# EAGLE board BRX_pan (EAGLE 6.2), part 1 of 2
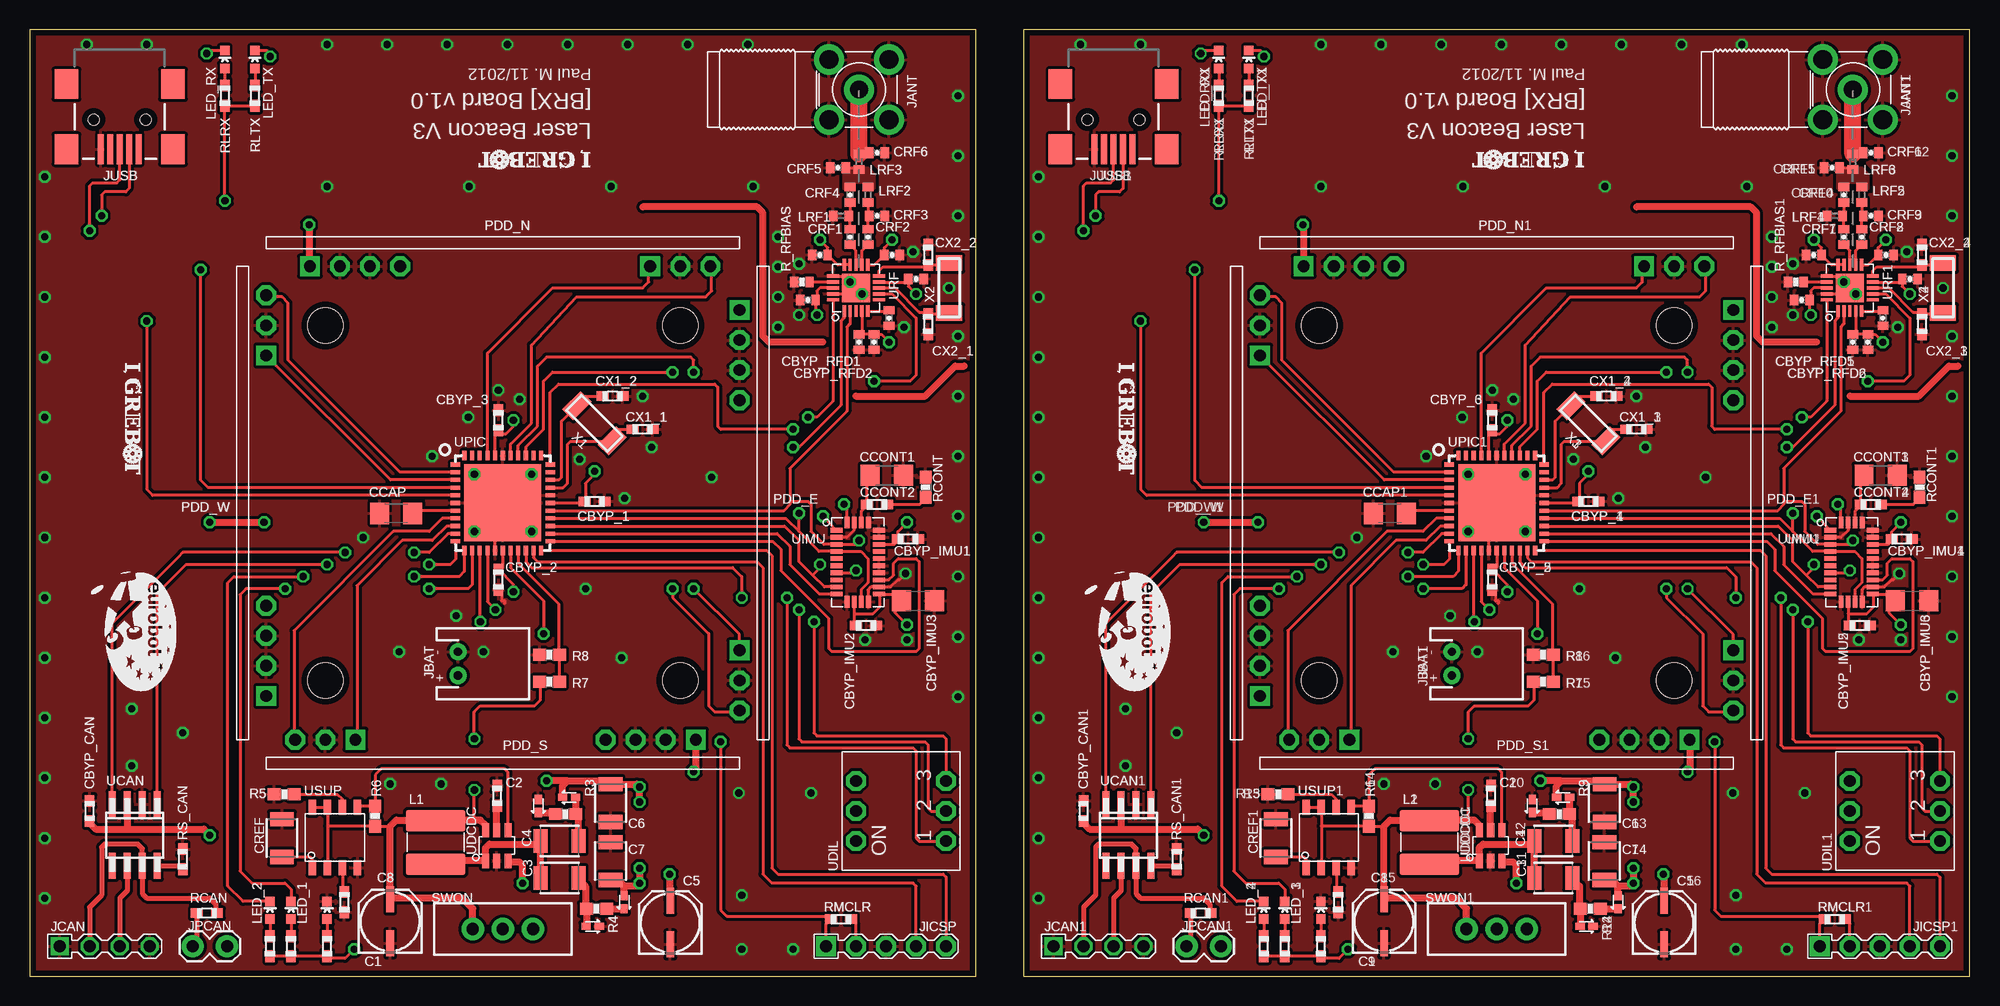
[diagram p0: board, top side]
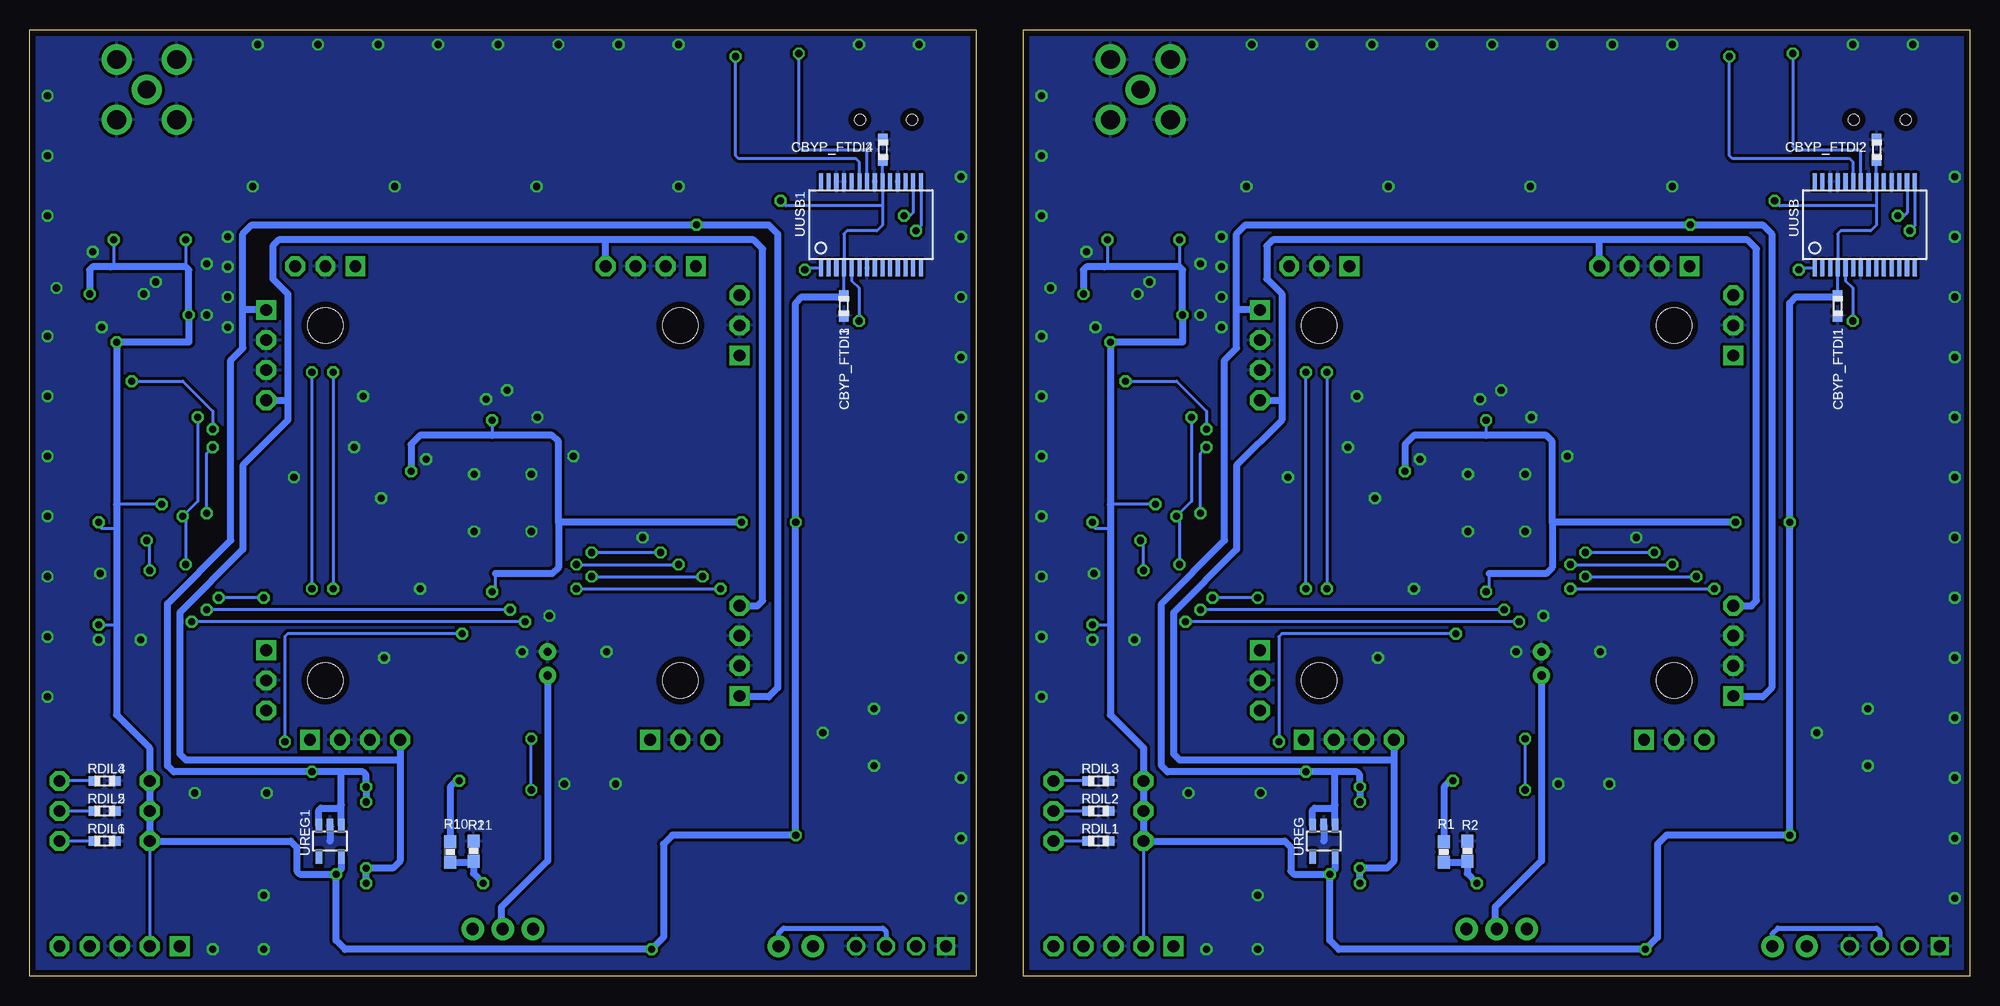
[diagram p1: board, bottom side, seen from below]

Size 164 x 80 mm. Coordinates in mm from the lower left corner, seen from the top.
Outline: 0,0 80,0 80,80 0,80 0,0
Outline: 84,0 164,0 164,80 84,80 84,0
Copper layers (1*16): Top 0.035mm / dielectric 1.5mm / Bottom 0.035mm
Design rules: minimum track width 10mil, minimum drill 0.6mm, track to track 6mil, track to pad 6mil, pad to pad 6mil, via to via 6mil, smd to smd 6mil, copper to edge 20mil, drill to drill 8mil, minimum pad ring 10mil, minimum via ring 8mil, stop-mask expansion 4mil, vias tented up to drill 0mil, thermal gap 10mil
Holes 3 mm at 25,55 55,55 55,25 25,25 109,55 139,55 139,25 109,25

## Footprints (pad centres in the part's own frame; a part is rotated, then mirrored left to right if it is on the bottom)
PANASONIC_C = smd 2.2 x 0.65: + 1.9,-0.2; - -1.8,-0.2
R0603 = smd 1 x 0.8: 1 -0.85,0; 2 0.85,0
1210 = smd 1.2 x 2: 1 -1.6,0; 2 1.6,0
1206 = smd 1.6 x 1.8: 1 -1.4,0; 2 1.4,0
0402-CAP = smd 0.7 x 0.9: 1 -0.65,0; 2 0.65,0
SOD-523 = smd 0.8 x 0.6: A -0.55,0; C 0.55,0
SMA-PCB-ANGLE = drill 1.5 pad 2.54: A 0,0 | drill 1.6 pad 2.54: B1 -2.54,2.54; B2 2.54,2.54; B3 2.54,-2.54; B4 -2.54,-2.54
JST-2-PTH = drill 0.7 pad 1.448: 1 -1,0; 2 1,0
CON4-2.54 = drill 1 square: 1 -3.81,0 | drill 1 octagon: 2 -1.27,0; 3 1.27,0; 4 3.81,0
CON5-2.54 = drill 1 pad 1.676 square: 1 -5.08,0 | drill 1 pad 1.676 octagon: 2 -2.54,0; 3 0,0; 4 2.54,0; 5 5.08,0
1X02_LOCK = drill 1.016 pad 1.88: 1 -0.178,0; 2 2.718,0
USB-MINIB = smd 2.5 x 0.5: D+ 2.5,0; D- 2.5,0.8; GND 2.5,-1.6; ID 2.5,-0.8; VBUS 2.5,1.6 | smd 2.5 x 2: MTN1 -3,4.5; MTN2 2.5,4.5; MTN3 -3,-4.5; MTN4 2.5,-4.5 | hole 0.9: 0,2.2; 0,-2.2
L-5X5 = smd 1.8 x 5: 1 -1.85,0; 2 1.85,0
LED-0603 = smd 0.8 x 0.8: A 0,-0.75; C 0,0.75
C0402 = smd 0.7 x 0.9: 1 -0.65,0; 2 0.65,0
PDD_SOCKET = drill 1 pad 1.676 square: 1 -16.31,0; 5 12.46,0 | drill 1 pad 1.676 octagon: 2 -13.77,0; 3 -11.23,0; 4 -8.69,0; 6 15,0; 7 17.54,0
0603-RES = smd 1.1 x 1: 1 -0.85,0; 2 0.85,0
0402-RES = smd 0.7 x 0.9: 1 -0.65,0; 2 0.65,0
SWITCH-SPDT = drill 1.016 pad 1.88: 1 0,2.54; 2 0,0; 3 0,-2.54
SO-08 = smd 0.6 x 2.2: 1 -1.905,-2.6; 2 -0.635,-2.6; 3 0.635,-2.6; 4 1.905,-2.6; 5 1.905,2.6; 6 0.635,2.6; 7 -0.635,2.6; 8 -1.905,2.6
TSOT-23 = smd 0.6 x 1.2: 1 -0.95,-1.3; 2 0,-1.3; 3 0.95,-1.3; 4 0.95,1.3; 5 0,1.3; 6 -0.95,1.3
SW_DIP-3 = drill 1 pad 1.676 octagon: 1A -2.54,3.81; 1B -2.54,-3.81; 2A 0,3.81; 2B 0,-3.81; 3A 2.54,3.81; 3B 2.54,-3.81
LLGA-28 = smd 0.4 x 1: 1 2.7,1.8; 2 2.1,1.8; 3 1.5,1.8; 4 0.9,1.8; 5 0.3,1.8; 6 -0.3,1.8; 7 -0.9,1.8; 8 -1.5,1.8; 9 -2.1,1.8; 10 -2.7,1.8; 15 -2.7,-1.8; 16 -2.1,-1.8; 17 -1.5,-1.8; 18 -0.9,-1.8; 19 -0.3,-1.8; 20 0.3,-1.8; 21 0.9,-1.8; 22 1.5,-1.8; 23 2.1,-1.8; 24 2.7,-1.8 | smd 1 x 0.4: 11 -3.35,0.9; 12 -3.35,0.3; 13 -3.35,-0.3; 14 -3.35,-0.9; 25 3.35,-0.9; 26 3.35,-0.3; 27 3.35,0.3; 28 3.35,0.9
QFN44-8X8 = smd 0.8 x 0.35: P$1 -4,3.25; P$2 -4,2.6; P$3 -4,1.95; P$4 -4,1.3; P$5 -4,0.65; P$6 -4,0; P$7 -4,-0.65; P$8 -4,-1.3; P$9 -4,-1.95; P$10 -4,-2.6; P$11 -4,-3.25; P$23 4,-3.25; P$24 4,-2.6; P$25 4,-1.95; P$26 4,-1.3; P$27 4,-0.65; P$28 4,0; P$29 4,0.65; P$30 4,1.3; P$31 4,1.95; P$32 4,2.6; P$33 4,3.25 | smd 0.35 x 0.8: P$12 -3.25,-4; P$13 -2.6,-4; P$14 -1.95,-4; P$15 -1.3,-4; P$16 -0.65,-4; P$17 0,-4; P$18 0.65,-4; P$19 1.3,-4; P$20 1.95,-4; P$21 2.6,-4; P$22 3.25,-4; P$34 3.25,4; P$35 2.6,4; P$36 1.95,4; P$37 1.3,4; P$38 0.65,4; P$39 0,4; P$40 -0.65,4; P$41 -1.3,4; P$42 -1.95,4; P$43 -2.6,4; P$44 -3.25,4 | smd 6.5 x 6.5: PAD 0,0
SOT23-5L = smd 0.55 x 1.2: 1 -0.95,-1.3; 2 0,-1.3; 3 0.95,-1.3; 4 0.95,1.3; 5 -0.95,1.3
QFN20-0.5 = smd 0.28 x 1: 1 -1,-1.95; 2 -0.5,-1.95; 3 0,-1.95; 4 0.5,-1.95; 5 1,-1.95; 11 1,1.95; 12 0.5,1.95; 13 0,1.95; 14 -0.5,1.95; 15 -1,1.95 | smd 1 x 0.28: 6 1.95,-1; 7 1.95,-0.5; 8 1.95,0; 9 1.95,0.5; 10 1.95,1; 16 -1.95,1; 17 -1.95,0.5; 18 -1.95,0; 19 -1.95,-0.5; 20 -1.95,-1 | smd 2.4 x 2.4: PAD 0,0
SOIC8 = smd 0.635 x 1.27: 1 -1.905,-2.54; 2 -0.635,-2.54; 3 0.635,-2.54; 4 1.905,-2.54; 5 1.905,2.54; 6 0.635,2.54; 7 -0.635,2.54; 8 -1.905,2.54
SSOP28DB = smd 0.348 x 1.397: 1 -4.225,-3.656; 2 -3.575,-3.656; 3 -2.925,-3.656; 4 -2.275,-3.656; 5 -1.625,-3.656; 6 -0.975,-3.656; 7 -0.325,-3.656; 8 0.325,-3.656; 9 0.975,-3.656; 10 1.625,-3.656; 11 2.275,-3.656; 12 2.925,-3.656; 13 3.575,-3.656; 14 4.225,-3.656; 15 4.225,3.656; 16 3.575,3.656; 17 2.925,3.656; 18 2.275,3.656; 19 1.625,3.656; 20 0.975,3.656; 21 0.325,3.656; 22 -0.325,3.656; 23 -0.975,3.656; 24 -1.625,3.656; 25 -2.275,3.656; 26 -2.925,3.656; 27 -3.575,3.656; 28 -4.225,3.656
XTAL_4.9-1.8 = smd 1.3 x 2.2: P$1 -2.1,0; P$2 2.1,0

## Placement (x,y rotation side)
C1  4.7uF  [PANASONIC_C]  30.28,4.6 90 top
C2  47nF_16V  [R0603]  39.52,15.26 90 top
C3  1uF_16V  [1210]  44.79,8.31 0 top
C4  1uF_16V  [1210]  44.79,11.44 0 top
C5  10uF  [PANASONIC_C]  53.95,4.49 90 top
C6  2.2uF_16V  [1210]  49.11,14.64 270 top
C7  2.2uF_16V  [1210]  49.11,9.74 90 top
C8  470nF  [R0603]  26.61,6.27 270 top
C9  4.7uF  [PANASONIC_C]  114.28,4.6 90 top
C10  47nF_16V  [R0603]  123.52,15.26 90 top
C11  1uF_16V  [1210]  128.79,8.31 0 top
C12  1uF_16V  [1210]  128.79,11.44 0 top
C13  2.2uF_16V  [1210]  133.11,14.64 270 top
C14  2.2uF_16V  [1210]  133.11,9.74 90 top
C15  470nF  [R0603]  110.61,6.27 270 top
C16  10uF  [PANASONIC_C]  137.95,4.49 90 top
CBYP_1  100nF_6.3V  [R0603]  47.75,40.13 0 top
CBYP_2  100nF_6.3V  [R0603]  39.62,33.53 270 top
CBYP_3  100nF_6.3V  [R0603]  39.62,46.99 90 top
CBYP_4  100nF_6.3V  [R0603]  131.75,40.13 0 top
CBYP_5  100nF_6.3V  [R0603]  123.62,33.53 270 top
CBYP_6  100nF_6.3V  [R0603]  123.62,46.99 90 top
CBYP_CAN  100nF_6.3V  [R0603]  5.08,13.97 90 top
CBYP_CAN1  100nF_6.3V  [R0603]  89.08,13.97 90 top
CBYP_FTDI1  100nF_6.3V  [R0603]  11.18,56.64 270 bottom
CBYP_FTDI2  100nF_6.3V  [R0603]  7.87,69.85 90 bottom
CBYP_FTDI3  100nF_6.3V  [R0603]  95.18,56.64 270 bottom
CBYP_FTDI4  100nF_6.3V  [R0603]  91.87,69.85 90 bottom
CBYP_IMU1  100nF_6.3V  [R0603]  74.25,36.95 0 top
CBYP_IMU2  100nF_6.3V  [R0603]  70.69,29.64 0 top
CBYP_IMU3  10uF_6.3V  [1206]  75.1,31.74 0 top
CBYP_IMU4  100nF_6.3V  [R0603]  158.25,36.95 0 top
CBYP_IMU5  100nF_6.3V  [R0603]  154.69,29.64 0 top
CBYP_IMU6  10uF_6.3V  [1206]  159.1,31.74 0 top
CBYP_RFA1  100nF_X5R  [0402-CAP]  72.9,60.96 180 top
CBYP_RFA2  100nF_X5R  [0402-CAP]  66.8,60.96 0 top
CBYP_RFA3  220pF_X7R  [0402-CAP]  65.79,57.15 0 top
CBYP_RFA4  220pF_X7R  [0402-CAP]  74.93,58.93 180 top
CBYP_RFA5  100nF_X5R  [0402-CAP]  156.9,60.96 180 top
CBYP_RFA6  100nF_X5R  [0402-CAP]  150.8,60.96 0 top
CBYP_RFA7  220pF_X7R  [0402-CAP]  149.79,57.15 0 top
CBYP_RFA8  220pF_X7R  [0402-CAP]  158.93,58.93 180 top
CBYP_RFD1  100nF_X5R  [0402-CAP]  70.1,53.59 90 top
CBYP_RFD2  220pF_X7R  [0402-CAP]  71.37,53.59 90 top
CBYP_RFD3  100nF_X5R  [0402-CAP]  72.64,55.63 90 top
CBYP_RFD4  100nF_X5R  [0402-CAP]  156.64,55.63 90 top
CBYP_RFD5  100nF_X5R  [0402-CAP]  154.1,53.59 90 top
CBYP_RFD6  220pF_X7R  [0402-CAP]  155.37,53.59 90 top
CCAP  10uF_6.3V  [1206]  30.99,39.12 180 top
CCAP1  10uF_6.3V  [1206]  114.99,39.12 180 top
CCONT1  10nF  [1206]  72.45,42.34 0 top
CCONT2  470nF  [R0603]  71.63,39.88 0 top
CCONT3  10nF  [1206]  156.45,42.34 0 top
CCONT4  470nF  [R0603]  155.63,39.88 0 top
CREF  1uF  [1210]  21.34,11.68 270 top
CREF1  1uF  [1210]  105.34,11.68 270 top
CRF1  100pF_NP0  [0402-CAP]  69.34,62.48 90 top
CRF2  100pF_NP0  [0402-CAP]  70.87,62.48 90 top
CRF3  1.0pF_NP0  [0402-CAP]  71.63,64.26 180 top
CRF4  1.0pF_NP0  [0402-CAP]  69.34,66.04 270 top
CRF5  1.8pF_NP0  [0402-CAP]  68.33,68.33 0 top
CRF6  1.5pF_NP0  [0402-CAP]  71.63,69.6 180 top
CRF7  100pF_NP0  [0402-CAP]  153.34,62.48 90 top
CRF8  100pF_NP0  [0402-CAP]  154.87,62.48 90 top
CRF9  1.0pF_NP0  [0402-CAP]  155.63,64.26 180 top
CRF10  1.0pF_NP0  [0402-CAP]  153.34,66.04 270 top
CRF11  1.8pF_NP0  [0402-CAP]  152.33,68.33 0 top
CRF12  1.5pF_NP0  [0402-CAP]  155.63,69.6 180 top
CX1_1  22pF_6.3V  [R0603]  51.82,46.23 0 top
CX1_2  22pF_6.3V  [R0603]  49.28,49.02 0 top
CX1_3  22pF_6.3V  [R0603]  135.82,46.23 0 top
CX1_4  22pF_6.3V  [R0603]  133.28,49.02 0 top
CX2_1  22pF_6.3V  [R0603]  75.95,55.12 270 top
CX2_2  22pF_6.3V  [R0603]  75.95,60.96 90 top
CX2_3  22pF_6.3V  [R0603]  159.95,55.12 270 top
CX2_4  22pF_6.3V  [R0603]  159.95,60.96 90 top
D1  PMEG2005  [SOD-523]  45.6,15.12 180 top
D2  PMEG2005  [SOD-523]  43,14.39 270 top
D3  PMEG2005  [SOD-523]  47.59,4.22 0 top
D4  PMEG2005  [SOD-523]  50.26,6.26 270 top
D5  PMEG2005  [SOD-523]  129.6,15.12 180 top
D6  PMEG2005  [SOD-523]  127,14.39 270 top
D7  PMEG2005  [SOD-523]  131.59,4.22 0 top
D8  PMEG2005  [SOD-523]  134.26,6.26 270 top
JANT  ENG_CD_1814400_C1  [SMA-PCB-ANGLE]  70.11,74.93 180 top
JANT1  ENG_CD_1814400_C1  [SMA-PCB-ANGLE]  154.11,74.93 180 top
JBAT  [JST-2-PTH]  36.21,26.42 270 top
JBAT1  [JST-2-PTH]  120.21,26.42 270 top
JCAN  SIL4  [CON4-2.54]  6.35,2.54 0 top
JCAN1  SIL4  [CON4-2.54]  90.35,2.54 0 top
JICSP  SIL5  [CON5-2.54]  72.39,2.54 0 top
JICSP1  SIL5  [CON5-2.54]  156.39,2.54 0 top
JPCAN  [1X02_LOCK]  13.97,2.54 0 top
JPCAN1  [1X02_LOCK]  97.97,2.54 0 top
JUSB  USBSMD  [USB-MINIB]  7.62,72.39 270 top
JUSB1  USBSMD  [USB-MINIB]  91.62,72.39 270 top
L1  10uH  [L-5X5]  34.31,11.31 270 top
L2  10uH  [L-5X5]  118.31,11.31 270 top
LED_1  [LED-0603]  22.1,5.59 0 top
LED_2  [LED-0603]  20.32,5.59 0 top
LED_3  [LED-0603]  106.1,5.59 0 top
LED_4  [LED-0603]  104.32,5.59 0 top
LED_POW  [LED-0603]  25.15,5.59 0 top
LED_POW1  [LED-0603]  109.15,5.59 0 top
LED_RX  [LED-0603]  16.51,77.47 0 top
LED_RX1  [LED-0603]  100.51,77.47 0 top
LED_TX  [LED-0603]  19.05,77.47 0 top
LED_TX1  [LED-0603]  103.05,77.47 0 top
LRF1  1.2nH  [C0402]  68.58,64.26 0 top
LRF2  1.2nH  [C0402]  70.87,66.04 90 top
LRF3  1.2nH  [C0402]  70.1,68.83 90 top
LRF4  1.2nH  [C0402]  152.58,64.26 0 top
LRF5  1.2nH  [C0402]  154.87,66.04 90 top
LRF6  1.2nH  [C0402]  154.1,68.83 90 top
PDD_E  PDD_BOARD  [PDD_SOCKET]  60,40 270 top
PDD_E1  PDD_BOARD  [PDD_SOCKET]  144,40 270 top
PDD_N  PDD_BOARD  [PDD_SOCKET]  40,60 0 top
PDD_N1  PDD_BOARD  [PDD_SOCKET]  124,60 0 top
PDD_S  PDD_BOARD  [PDD_SOCKET]  40,20 180 top
PDD_S1  PDD_BOARD  [PDD_SOCKET]  124,20 180 top
PDD_W  PDD_BOARD  [PDD_SOCKET]  20,40 90 top
PDD_W1  PDD_BOARD  [PDD_SOCKET]  104,40 90 top
R1  113k  [0603-RES]  44.47,10.5 90 bottom
R2  13.3k  [0603-RES]  42.48,10.58 270 bottom
R3  1  [0603-RES]  45.3,13.71 0 top
R4  1  [0603-RES]  47.92,5.7 180 top
R5  10k  [0603-RES]  21.52,15.38 0 top
R6  10k  [0603-RES]  29.21,13.54 90 top
R7  20k  [0603-RES]  43.94,24.89 0 top
R8  10k  [0603-RES]  43.94,27.18 0 top
R9  1  [0603-RES]  129.3,13.71 0 top
R10  113k  [0603-RES]  128.47,10.5 90 bottom
R11  13.3k  [0603-RES]  126.48,10.58 270 bottom
R12  1  [0603-RES]  131.92,5.7 180 top
R13  10k  [0603-RES]  105.52,15.38 0 top
R14  10k  [0603-RES]  113.21,13.54 90 top
R15  20k  [0603-RES]  127.94,24.89 0 top
R16  10k  [0603-RES]  127.94,27.18 0 top
R_RFBIAS  56k  [0402-RES]  65.28,58.67 180 top
R_RFBIAS1  56k  [0402-RES]  149.28,58.67 180 top
RCAN  100  [R0603]  14.99,5.33 180 top
RCAN1  100  [R0603]  98.99,5.33 180 top
RCONT  10k  [0603-RES]  75.74,41.32 270 top
RCONT1  10k  [0603-RES]  159.74,41.32 270 top
RDIL1  10k  [R0603]  73.66,11.43 0 bottom
RDIL2  10k  [R0603]  73.66,13.97 0 bottom
RDIL3  10k  [R0603]  73.66,16.51 0 bottom
RDIL4  10k  [R0603]  157.66,16.51 0 bottom
RDIL5  10k  [R0603]  157.66,13.97 0 bottom
RDIL6  10k  [R0603]  157.66,11.43 0 bottom
RL1  270  [R0603]  22.1,2.54 90 top
RL2  270  [R0603]  20.32,2.54 90 top
RL3  270  [R0603]  106.1,2.54 90 top
RL4  270  [R0603]  104.32,2.54 90 top
RLPOW  270  [R0603]  25.15,2.54 90 top
RLPOW1  270  [R0603]  109.15,2.54 90 top
RLRX  270  [R0603]  16.51,74.42 90 top
RLRX1  270  [R0603]  100.51,74.42 90 top
RLTX  270  [R0603]  19.05,74.42 90 top
RLTX1  270  [R0603]  103.05,74.42 90 top
RMCLR  4.7k  [R0603]  68.58,4.83 180 top
RMCLR1  4.7k  [R0603]  152.58,4.83 180 top
RS_CAN  10k  [R0603]  12.95,9.91 270 top
RS_CAN1  10k  [R0603]  96.95,9.91 270 top
SWON  [SWITCH-SPDT]  40,4 90 top
SWON1  [SWITCH-SPDT]  124,4 90 top
U$1  LOGOIGREBOT  [LOGO_IGREBOT]  131.5,69.98 180 top
U$2  LOGOEUROBOT  [LOGO_EUROBOT_1]  88.7,34.67 270 top
U$3  LOGOEUROBOT  [LOGO_EUROBOT_1]  4.7,34.67 270 top
U$4  LOGOIGREBOT  [LOGO_IGREBOT]  91.75,51.94 270 top
U$5  LOGOIGREBOT  [LOGO_IGREBOT]  47.5,69.98 180 top
U$9  LOGOIGREBOT  [LOGO_IGREBOT]  7.75,51.94 270 top
UCAN  MCP2551  [SO-08]  8.89,11.94 180 top
UCAN1  MCP2551  [SO-08]  92.89,11.94 180 top
UDCDC  LT3467A  [TSOT-23]  39.49,11.05 0 top
UDCDC1  LT3467A  [TSOT-23]  123.49,11.05 0 top
UDIL  A6E-3104  [SW_DIP-3]  73.66,13.97 90 top
UDIL1  A6E-3104  [SW_DIP-3]  157.66,13.97 90 top
UIMU  LSM330DL  [LLGA-28]  70,35 90 top
UIMU1  LSM330DL  [LLGA-28]  154,35 90 top
UPIC  DSPIC33FJ128MC804_QFN  [QFN44-8X8]  40,40 0 top
UPIC1  DSPIC33FJ128MC804_QFN  [QFN44-8X8]  124,40 0 top
UREG  MCP1801  [SOT23-5L]  54.61,11.43 180 bottom
UREG1  MCP1801  [SOT23-5L]  138.61,11.43 180 bottom
URF  CC2500  [QFN20-0.5]  69.85,58.17 0 top
URF1  CC2500  [QFN20-0.5]  153.85,58.17 0 top
USUP  TL7709AC  [SOIC8]  25.81,11.73 0 top
USUP1  TL7709AC  [SOIC8]  109.81,11.73 0 top
UUSB  FT232RL-BASICSSOP  [SSOP28DB]  8.89,63.5 0 bottom
UUSB1  FT232RL-BASICSSOP  [SSOP28DB]  92.89,63.5 0 bottom
X1  8MHz  [XTAL_4.9-1.8]  47.75,46.74 135 top
X2  26MHz  [XTAL_4.9-1.8]  77.72,58.17 90 top
X3  8MHz  [XTAL_4.9-1.8]  131.75,46.74 135 top
X4  26MHz  [XTAL_4.9-1.8]  161.72,58.17 90 top

## Library data of the parts
C1 C3-C7 C9 C11-C14 C16 CBYP_RFA1-CBYP_RFA8 CBYP_RFD1-CBYP_RFD6 CREF CREF1 CRF1-CRF12 JPCAN JPCAN1 LRF1-LRF6 R1-R16 R_RFBIAS R_RFBIAS1 RCONT RCONT1 = SparkFun-Passives
C2 C8 C10 C15 CBYP_1-CBYP_6 CBYP_CAN CBYP_CAN1 CBYP_FTDI1-CBYP_FTDI4 CBYP_IMU1 CBYP_IMU2 CBYP_IMU4 CBYP_IMU5 CCONT2 CCONT4 CX1_1-CX1_4 CX2_1-CX2_4 RCAN RCAN1 RDIL1-RDIL6 RL1-RL4 RLPOW RLPOW1 RLRX RLRX1 RLTX RLTX1 RMCLR RMCLR1 RS_CAN RS_CAN1 U$1-U$5 U$9 UCAN UCAN1 UPIC UPIC1 UREG UREG1 X1-X4 = 0SBLib
CBYP_IMU3 CBYP_IMU6 CCAP CCAP1 CCONT1 CCONT3 JUSB JUSB1 LED_1-LED_4 LED_POW LED_POW1 LED_RX LED_RX1 LED_TX LED_TX1 UUSB UUSB1 = SparkFun
D1-D8 = SparkFun-DiscreteSemi
JANT JANT1 JCAN JCAN1 JICSP JICSP1 L1 L2 PDD_E PDD_E1 PDD_N PDD_N1 PDD_S PDD_S1 PDD_W PDD_W1 UDCDC UDCDC1 UDIL UDIL1 UIMU UIMU1 URF URF1 USUP USUP1 = lib_paul_v6
JBAT JBAT1 = SparkFun-Connectors
SWON SWON1 = SparkFun-Electromechanical

## Nets
3.3V: C5.+ CBYP_1.1 CBYP_2.1 CBYP_3.1 CBYP_CAN.1 CBYP_FTDI1.1 CBYP_FTDI2.1 CBYP_IMU1.1 CBYP_IMU2.1 CBYP_IMU3.1 CBYP_RFA1.2 CBYP_RFA2.2 CBYP_RFA3.2 CBYP_RFA4.2 CBYP_RFD1.2 CBYP_RFD2.2 JICSP.2 RL1.1 RL2.1 RLPOW.1 RLRX.1 RLTX.1 RMCLR.1 UCAN.3 UDIL.1A UDIL.2A UDIL.3A UIMU.12 UIMU.15 UIMU.22 UIMU.28 UPIC.P$17 UPIC.P$28 UPIC.P$40 UREG.5 URF.4 URF.9 URF.11 URF.14 URF.15 URF.18 UUSB.4 UUSB.20
3.3V1: C16.+ CBYP_4.1 CBYP_5.1 CBYP_6.1 CBYP_CAN1.1 CBYP_FTDI3.1 CBYP_FTDI4.1 CBYP_IMU4.1 CBYP_IMU5.1 CBYP_IMU6.1 CBYP_RFA5.2 CBYP_RFA6.2 CBYP_RFA7.2 CBYP_RFA8.2 CBYP_RFD5.2 CBYP_RFD6.2 JICSP1.2 RL3.1 RL4.1 RLPOW1.1 RLRX1.1 RLTX1.1 RMCLR1.1 UCAN1.3 UDIL1.1A UDIL1.2A UDIL1.3A UIMU1.12 UIMU1.15 UIMU1.22 UIMU1.28 UPIC1.P$17 UPIC1.P$28 UPIC1.P$40 UREG1.5 URF1.4 URF1.9 URF1.11 URF1.14 URF1.15 URF1.18 UUSB1.4 UUSB1.20
!CSN!_A: UIMU.17 UPIC.P$23
!CSN!_A1: UIMU1.17 UPIC1.P$23
!CSN!_G: UIMU.10 UPIC.P$24
!CSN!_G1: UIMU1.10 UPIC1.P$24
!CSN!_RF: UPIC.P$33 URF.7
!CSN!_RF1: UPIC1.P$33 URF1.7
!MCLR!: JICSP.1 RMCLR.2 UPIC.P$18
!MCLR!1: JICSP1.1 RMCLR1.2 UPIC1.P$18
!SHDN!: R6.2 UDCDC.4 USUP.5
!SHDN!1: R14.2 UDCDC1.4 USUP1.5
+12V: C6.1 D1.C PDD_E.1 PDD_N.1 PDD_S.1 PDD_W.1 R1.2 UREG.1 UREG.3
+12V1: C13.1 D5.C PDD_E1.1 PDD_N1.1 PDD_S1.1 PDD_W1.1 R10.2 UREG1.1 UREG1.3
-12V: C7.1 D4.A PDD_E.4 PDD_N.4 PDD_S.4 PDD_W.4
-12V1: C14.1 D8.A PDD_E1.4 PDD_N1.4 PDD_S1.4 PDD_W1.4
CAN_RX: UCAN.4 UPIC.P$10
CAN_RX1: UCAN1.4 UPIC1.P$10
CAN_TX: UCAN.1 UPIC.P$11
CAN_TX1: UCAN1.1 UPIC1.P$11
CANH: JCAN.2 RCAN.1 UCAN.7
CANH1: JCAN1.2 RCAN1.1 UCAN1.7
CANL: JCAN.3 JPCAN.2 UCAN.6
CANL1: JCAN1.3 JPCAN1.2 UCAN1.6
DIL1: RDIL1.1 UDIL.1B UPIC.P$20
DIL2: RDIL2.1 UDIL.2B UPIC.P$15
DIL3: RDIL3.1 UDIL.3B UPIC.P$14
DIL4: RDIL4.1 UDIL1.3B UPIC1.P$14
DIL5: RDIL5.1 UDIL1.2B UPIC1.P$15
DIL6: RDIL6.1 UDIL1.1B UPIC1.P$20
E_!A-B!: PDD_E.5 UPIC.P$37
E_!A-B!1: PDD_E1.5 UPIC1.P$37
E_!B-A!: PDD_E.7 UPIC.P$36
E_!B-A!1: PDD_E1.7 UPIC1.P$36
GND: C1.- C2.2 C5.- C6.2 C7.2 C8.2 CBYP_1.2 CBYP_2.2 CBYP_3.2 CBYP_CAN.2 CBYP_FTDI1.2 CBYP_FTDI2.2 CBYP_IMU1.2 CBYP_IMU2.2 CBYP_IMU3.2 CBYP_RFA1.1 CBYP_RFA2.1 CBYP_RFA3.1 CBYP_RFA4.1 CBYP_RFD1.1 CBYP_RFD2.1 CBYP_RFD3.1 CCAP.2 CCONT1.2 CREF.1 CRF3.1 CRF5.1 CRF6.1 CX1_1.2 CX1_2.2 CX2_1.2 CX2_2.2 D2.A D3.C JANT.B1 JANT.B2 JANT.B3 JANT.B4 JBAT.1 JCAN.1 JCAN.4 JICSP.3 JUSB.GND LED_POW.C LRF1.1 PDD_E.2 PDD_E.3 PDD_E.6 PDD_N.2 PDD_N.3 PDD_N.6 PDD_S.2 PDD_S.3 PDD_S.6 PDD_W.2 PDD_W.3 PDD_W.6 R2.1 R5.1 R8.1 R_RFBIAS.2 RCONT.1 RDIL1.2 RDIL2.2 RDIL3.2 RS_CAN.1 UCAN.2 UDCDC.2 UIMU.2 UIMU.11 UIMU.14 UIMU.16 UIMU.18 UIMU.19 UIMU.20 UIMU.23 UIMU.24 UIMU.25 UIMU.27 UPIC.P$6 UPIC.P$16 UPIC.P$29 UPIC.P$39 UPIC.PAD UREG.2 URF.16 URF.19 URF.PAD USUP.4 UUSB.7 UUSB.18 UUSB.21 UUSB.25 UUSB.26
GND1: C9.- C10.2 C13.2 C14.2 C15.2 C16.- CBYP_4.2 CBYP_5.2 CBYP_6.2 CBYP_CAN1.2 CBYP_FTDI3.2 CBYP_FTDI4.2 CBYP_IMU4.2 CBYP_IMU5.2 CBYP_IMU6.2 CBYP_RFA5.1 CBYP_RFA6.1 CBYP_RFA7.1 CBYP_RFA8.1 CBYP_RFD4.1 CBYP_RFD5.1 CBYP_RFD6.1 CCAP1.2 CCONT3.2 CREF1.1 CRF9.1 CRF11.1 CRF12.1 CX1_3.2 CX1_4.2 CX2_3.2 CX2_4.2 D6.A D7.C JANT1.B1 JANT1.B2 JANT1.B3 JANT1.B4 JBAT1.1 JCAN1.1 JCAN1.4 JICSP1.3 JUSB1.GND LED_POW1.C LRF4.1 PDD_E1.2 PDD_E1.3 PDD_E1.6 PDD_N1.2 PDD_N1.3 PDD_N1.6 PDD_S1.2 PDD_S1.3 PDD_S1.6 PDD_W1.2 PDD_W1.3 PDD_W1.6 R11.1 R13.1 R16.1 R_RFBIAS1.2 RCONT1.1 RDIL4.2 RDIL5.2 RDIL6.2 RS_CAN1.1 UCAN1.2 UDCDC1.2 UIMU1.2 UIMU1.11 UIMU1.14 UIMU1.16 UIMU1.18 UIMU1.19 UIMU1.20 UIMU1.23 UIMU1.24 UIMU1.25 UIMU1.27 UPIC1.P$6 UPIC1.P$16 UPIC1.P$29 UPIC1.P$39 UPIC1.PAD UREG1.2 URF1.16 URF1.19 URF1.PAD USUP1.4 UUSB1.7 UUSB1.18 UUSB1.21 UUSB1.25 UUSB1.26
LED_1: LED_1.C UPIC.P$13
LED_2: LED_2.C UPIC.P$12
LED_3: LED_3.C UPIC1.P$13
LED_4: LED_4.C UPIC1.P$12
LED_RX: LED_RX.C UUSB.22
LED_RX1: LED_RX1.C UUSB1.22
LED_TX: LED_TX.C UUSB.23
LED_TX1: LED_TX1.C UUSB1.23
MISO: UIMU.3 UIMU.7 UPIC.P$27 URF.2
MISO1: UIMU1.3 UIMU1.7 UPIC1.P$27 URF1.2
MOSI: UIMU.1 UIMU.9 UPIC.P$25 URF.20
MOSI1: UIMU1.1 UIMU1.9 UPIC1.P$25 URF1.20
N$1: CRF1.2 CRF4.2 LRF1.2
N$2: LED_TX.A RLTX.2
N$3: CRF2.2 CRF3.2 LRF2.1
N$4: CRF4.1 CRF5.2 LRF2.2 LRF3.1
N$5: RS_CAN.2 UCAN.8
N$6: JPCAN.1 RCAN.2
N$7: CRF6.2 JANT.A LRF3.2
N$8: LED_RX.A RLRX.2
N$9: LED_1.A RL1.2
N$10: LED_2.A RL2.2
N$11: C2.1 UDCDC.5
N$12: JBAT.2 SWON.2
N$13: C3.1 C4.1 L1.2 UDCDC.1
N$14: C3.2 D3.A R4.2
N$15: D2.C R3.1
N$16: C4.2 D1.A R3.2
N$17: R5.2 USUP.6
N$18: R1.1 R2.2 UDCDC.3
N$19: D4.C R4.1
N$20: CCONT2.2 RCONT.2
N$22: LED_POW.A RLPOW.2
N$23: RS_CAN1.2 UCAN1.8
N$24: CRF7.2 CRF10.2 LRF4.2
N$25: CRF8.2 CRF9.2 LRF5.1
N$26: CRF10.1 CRF11.2 LRF5.2 LRF6.1
N$27: CRF12.2 JANT1.A LRF6.2
N$28: JPCAN1.1 RCAN1.2
N$29: LED_TX1.A RLTX1.2
N$30: LED_RX1.A RLRX1.2
N$31: LED_3.A RL3.2
N$32: LED_4.A RL4.2
N$33: C11.1 C12.1 L2.2 UDCDC1.1
N$34: C10.1 UDCDC1.5
N$35: D6.C R9.1
N$36: C12.2 D5.A R9.2
N$37: D8.C R12.1
N$38: C11.2 D7.A R12.2
N$39: R10.1 R11.2 UDCDC1.3
N$40: R13.2 USUP1.6
N$41: JBAT1.2 SWON1.2
N$42: CCONT4.2 RCONT1.2
N$43: LED_POW1.A RLPOW1.2
N_!A-B!: PDD_N.5 UPIC.P$41
N_!A-B!1: PDD_N1.5 UPIC1.P$41
N_!B-A!: PDD_N.7 UPIC.P$38
N_!B-A!1: PDD_N1.7 UPIC1.P$38
PGC: JICSP.5 UPIC.P$22
PGC1: JICSP1.5 UPIC1.P$22
PGD: JICSP.4 UPIC.P$21
PGD1: JICSP1.4 UPIC1.P$21
R_RFBIAS: R_RFBIAS.1 URF.17
R_RFBIAS1: R_RFBIAS1.1 URF1.17
RF_N: CRF1.1 URF.13
RF_N1: CRF7.1 URF1.13
RF_P: CRF2.1 URF.12
RF_P1: CRF8.1 URF1.12
S_!A-B!: PDD_S.5 UPIC.P$9
S_!A-B!1: PDD_S1.5 UPIC1.P$9
S_!B-A!: PDD_S.7 UPIC.P$8
S_!B-A!1: PDD_S1.7 UPIC1.P$8
SCLK: UIMU.4 UIMU.13 UPIC.P$26 URF.1
SCLK1: UIMU1.4 UIMU1.13 UPIC1.P$26 URF1.1
SENSE_BAT: R7.2 R8.2 UPIC.P$19
SENSE_BAT1: R15.2 R16.2 UPIC1.P$19
USB_RX: UPIC.P$5 UUSB.5
USB_RX1: UPIC1.P$5 UUSB1.5
USB_TX: UPIC.P$4 UUSB.1
USB_TX1: UPIC1.P$4 UUSB1.1
USBDM: JUSB.D- UUSB.16
USBDM1: JUSB1.D- UUSB1.16
USBDP: JUSB.D+ UUSB.15
USBDP1: JUSB1.D+ UUSB1.15
VBAT: C1.+ L1.1 R6.1 R7.1 SWON.1 UDCDC.6 USUP.2 USUP.7 USUP.8
VBAT1: C9.+ L2.1 R14.1 R15.1 SWON1.1 UDCDC1.6 USUP1.2 USUP1.7 USUP1.8
VCAP: CCAP.1 UPIC.P$7
VCAP1: CCAP1.1 UPIC1.P$7
VCONT: CCONT1.1 CCONT2.1 UIMU.26
VCONT1: CCONT3.1 CCONT4.1 UIMU1.26
VCT: C8.1 USUP.3
VCT1: C15.1 USUP1.3
VDCOUPL: CBYP_RFD3.2 URF.5
VDCOUPL1: CBYP_RFD4.2 URF1.5
VREF: CREF.2 USUP.1
VREF1: CREF1.2 USUP1.1
W_!A-B!: PDD_W.5 UPIC.P$3
W_!A-B!1: PDD_W1.5 UPIC1.P$3
W_!B-A!: PDD_W.7 UPIC.P$2
W_!B-A!1: PDD_W1.7 UPIC1.P$2
X1_OSC1: CX1_1.1 UPIC.P$30 X1.P$1
X1_OSC2: CX1_2.1 UPIC.P$31 X1.P$2
X1_OSC3: CX1_3.1 UPIC1.P$30 X3.P$1
X1_OSC4: CX1_4.1 UPIC1.P$31 X3.P$2
X2_OSC1: CX2_1.1 URF.8 X2.P$1
X2_OSC2: CX2_2.1 URF.10 X2.P$2
X2_OSC3: CX2_3.1 URF1.8 X4.P$1
X2_OSC4: CX2_4.1 URF1.10 X4.P$2

## Tracks (layer width: path | path; a pad name or v marks a point on that pad's centre or on a via)
3.3V  (via drill 0.6)
  Top 0.254: URF.9 74.02,58.67 CBYP_RFA4.2 74.28,58.31 v74.93,57.66 | URF.4 70.35,54.49 CBYP_RFD1.2 CBYP_RFD2.2 71.99,54.24 v72.64,53.59 | URF.18 66.8,58.17 66.55,57.91 66.55,57.26 CBYP_RFA3.2 66.44,55.99 v66.55,55.88 | URF.14 URF.15 68.3,60.12 CBYP_RFA2.2 67.45,61.58 v66.8,62.23 | URF.11 71.4,60.12 CBYP_RFA1.2 72.25,61.58 v72.9,62.23 | UPIC.P$28 46.77,40 CBYP_1.1 | UPIC.P$40 39.35,45.87 | 39.35,45.87 CBYP_3.1 | JICSP.2 69.85,4.41 RMCLR.1 | 73.14,32.3 UIMU.15 71.88,32.22 71.88,31.24 71.3,30.66 69.7,30.66 | 73.14,32.3 CBYP_IMU3.1 | UIMU.22 73.08,36.5 CBYP_IMU1.1 73.4,37.58 v74.17,38.35 | 73.14,32.3 73.14,30.74 v74.17,29.72 | UIMU.12 69.7,30.66 | 69.7,30.66 69.7,29.78 CBYP_IMU2.1 | UIMU.28 69.1,39.61 v68.83,39.88 | RLTX.1 RLRX.1 v16.51,65.53 | v27.43,2.29 26.67,1.52 25.31,1.52 RLPOW.1 RL1.1 RL2.1 | 39.35,45.87 40.28,45.87 40.89,46.48 v40.89,46.99 | 46.74,40.3 CBYP_1.1 | UPIC.P$17 40,34.51 CBYP_2.1 40.89,33.11 v40.89,32.51 | v47.75,42.67 47.75,42.42 46.99,41.66 46.99,40.22 CBYP_1.1
  Top 0.61: C5.+ 54.15,8.84 v54.1,8.64 | CBYP_CAN.1 5.08,12.95 5.59,12.45 8.38,12.45 | 8.38,12.45 14.73,12.45 v15.24,11.94 | UCAN.3 8.26,12.57 8.38,12.45 | v15.24,38.35 v19.81,38.35
  Bottom 0.254: v66.8,62.23 66.8,59.94 | v72.9,62.23 72.9,60.2 73.15,59.94 | v74.17,38.35 74.17,38.1 73.91,37.85 72.64,37.85 | v74.17,29.72 72.64,29.72 | v68.83,39.88 72.64,39.88 | 7.92,65.11 UUSB.20 7.92,68.96 CBYP_FTDI2.1 | 7.92,65.11 7.92,63.46 8.38,62.99 10.92,62.99 11.18,62.74 11.18,59.85 UUSB.4 CBYP_FTDI1.1 | 7.92,65.11 16.08,65.11 v16.51,65.53 | v40.89,46.99 40.89,45.72 | 40.64,34.04 40.64,32.77 v40.89,32.51 | UDIL.1A JICSP.2
  Bottom 0.61: v74.93,57.66 74.93,59.69 74.68,59.94 73.15,59.94 66.8,59.94 66.55,59.69 v66.55,55.88 66.55,53.59 v72.64,53.59 72.64,39.88 72.64,37.85 72.64,29.72 72.64,22.1 69.85,19.3 UDIL.3A UDIL.2A UDIL.1A 57.91,11.43 57.4,10.92 57.4,8.89 57.15,8.64 v54.1,8.64 | v54.1,8.64 53.66,9.08 UREG.5 | v54.1,8.64 54.1,3.05 53.34,2.29 v27.43,2.29 26.42,3.3 26.42,11.18 25.65,11.94 v15.24,11.94 v15.24,38.35 15.24,56.9 14.73,57.4 11.26,57.4 CBYP_FTDI1.1 | v19.81,38.35 35.31,38.35 | 35.31,38.35 35.31,34.54 35.81,34.04 40.64,34.04 | 35.31,38.35 35.31,45.21 35.81,45.72 40.89,45.72 46.99,45.72 47.75,44.96 v47.75,42.67
3.3V1  (via drill 0.6)
  Top 0.254: URF1.9 158.02,58.67 CBYP_RFA8.2 158.28,58.31 v158.93,57.66 | URF1.4 154.35,54.49 CBYP_RFD5.2 CBYP_RFD6.2 155.99,54.24 v156.64,53.59 | URF1.18 150.8,58.17 150.55,57.91 150.55,57.26 CBYP_RFA7.2 150.44,55.99 v150.55,55.88 | URF1.14 URF1.15 152.3,60.12 CBYP_RFA6.2 151.45,61.58 v150.8,62.23 | URF1.11 155.4,60.12 CBYP_RFA5.2 156.25,61.58 v156.9,62.23 | UPIC1.P$28 130.77,40 CBYP_4.1 | UPIC1.P$40 123.35,45.87 | 123.35,45.87 CBYP_6.1 | JICSP1.2 153.85,4.41 RMCLR1.1 | 157.14,32.3 UIMU1.15 155.88,32.22 155.88,31.24 155.3,30.66 153.7,30.66 | 157.14,32.3 CBYP_IMU6.1 | UIMU1.22 157.08,36.5 CBYP_IMU4.1 157.4,37.58 v158.17,38.35 | 157.14,32.3 157.14,30.74 v158.17,29.72 | UIMU1.12 153.7,30.66 | 153.7,30.66 153.7,29.78 CBYP_IMU5.1 | UIMU1.28 153.1,39.61 v152.83,39.88 | RLTX1.1 RLRX1.1 v100.51,65.53 | v111.43,2.29 110.67,1.52 109.31,1.52 RLPOW1.1 RL3.1 RL4.1 | 123.35,45.87 124.28,45.87 124.89,46.48 v124.89,46.99 | 130.74,40.3 CBYP_4.1 | UPIC1.P$17 124,34.51 CBYP_5.1 124.89,33.11 v124.89,32.51 | v131.75,42.67 131.75,42.42 130.99,41.66 130.99,40.22 CBYP_4.1
  Top 0.61: C16.+ 138.15,8.84 v138.1,8.64 | CBYP_CAN1.1 89.08,12.95 89.59,12.45 92.38,12.45 | 92.38,12.45 98.73,12.45 v99.24,11.94 | UCAN1.3 92.25,12.57 92.38,12.45 | v99.24,38.35 v103.81,38.35
  Bottom 0.254: v150.8,62.23 150.8,59.94 | v156.9,62.23 156.9,60.2 157.15,59.94 | v158.17,38.35 158.17,38.1 157.91,37.85 156.64,37.85 | v158.17,29.72 156.64,29.72 | v152.83,39.88 156.64,39.88 | 91.92,65.11 UUSB1.20 91.92,68.96 CBYP_FTDI4.1 | 91.92,65.11 91.92,63.46 92.38,62.99 94.92,62.99 95.18,62.74 95.18,59.85 UUSB1.4 CBYP_FTDI3.1 | 91.92,65.11 100.08,65.11 v100.51,65.53 | v124.89,46.99 124.89,45.72 | 124.64,34.04 124.64,32.77 v124.89,32.51 | UDIL1.1A JICSP1.2
  Bottom 0.61: v158.93,57.66 158.93,59.69 158.68,59.94 157.15,59.94 150.8,59.94 150.55,59.69 v150.55,55.88 150.55,53.59 v156.64,53.59 156.64,39.88 156.64,37.85 156.64,29.72 156.64,22.1 153.85,19.3 UDIL1.3A UDIL1.2A UDIL1.1A 141.91,11.43 141.4,10.92 141.4,8.89 141.15,8.64 v138.1,8.64 | v138.1,8.64 137.66,9.08 UREG1.5 | v138.1,8.64 138.1,3.05 137.34,2.29 v111.43,2.29 110.42,3.3 110.42,11.18 109.65,11.94 v99.24,11.94 v99.24,38.35 99.24,56.9 98.73,57.4 95.26,57.4 CBYP_FTDI3.1 | v103.81,38.35 119.31,38.35 | 119.31,38.35 119.31,34.54 119.81,34.04 124.64,34.04 | 119.31,38.35 119.31,45.21 119.81,45.72 124.89,45.72 130.99,45.72 131.75,44.96 v131.75,42.67
!CSN!_A
  Top 0.254: UPIC.P$23 62.82,36.75 63.5,36.07 63.5,34.29 67.56,30.23 67.56,27.69 67.82,27.43 74.93,27.43 75.18,27.69 75.18,35.05 74.93,35.31 73.41,35.31 73.03,34.92 73.03,33.91 72.62,33.5 UIMU.17
!CSN!_A1
  Top 0.254: UPIC1.P$23 146.82,36.75 147.5,36.07 147.5,34.29 151.56,30.23 151.56,27.69 151.82,27.43 158.93,27.43 159.18,27.69 159.18,35.05 158.93,35.31 157.41,35.31 157.03,34.92 157.03,33.91 156.62,33.5 UIMU1.17
!CSN!_G
  Top 0.254: UIMU.10 66.76,32.3 64.26,34.8 64.26,36.32 63.18,37.4 UPIC.P$24
!CSN!_G1
  Top 0.254: UIMU1.10 150.76,32.3 148.26,34.8 148.26,36.32 147.18,37.4 UPIC1.P$24
!CSN!_RF  (via drill 0.6)
  Top 0.254: URF.7 72.89,57.67 74.93,55.63 74.93,50.8 74.42,50.29 v71.37,50.29 | UPIC.P$33 44,49.33 44.7,50.04 57.91,50.04 58.17,49.78 58.17,46.48 58.42,46.23 v64.52,46.23
  Bottom 0.254: v71.37,50.29 67.06,50.29 64.52,47.75 v64.52,46.23
!CSN!_RF1  (via drill 0.6)
  Top 0.254: URF1.7 156.89,57.67 158.93,55.63 158.93,50.8 158.42,50.29 v155.37,50.29 | UPIC1.P$33 128,49.33 128.7,50.04 141.91,50.04 142.17,49.78 142.17,46.48 142.42,46.23 v148.52,46.23
  Bottom 0.254: v155.37,50.29 151.06,50.29 148.52,47.75 v148.52,46.23
!MCLR!  (via drill 0.6)
  Top 0.254: JICSP.1 67.31,4.41 RMCLR.2 67.48,5.08 58.93,5.08 58.42,5.59 v58.42,19.81 | UPIC.P$18 40.65,34.53 43.43,31.75 v43.43,28.96
  Bottom 0.254: v43.43,28.96 58.17,28.96 58.42,28.7 v58.42,19.81
!MCLR!1  (via drill 0.6)
  Top 0.254: JICSP1.1 151.31,4.41 RMCLR1.2 151.48,5.08 142.93,5.08 142.42,5.59 v142.42,19.81 | UPIC1.P$18 124.65,34.53 127.43,31.75 v127.43,28.96
  Bottom 0.254: v127.43,28.96 142.17,28.96 142.42,28.7 v142.42,19.81
!SHDN!
  Top 0.254: UDCDC.4 40.44,17.22 40.13,17.53 29.72,17.53 29.21,17.02 R6.2 27.83,14.39 USUP.5
!SHDN!1
  Top 0.254: UDCDC1.4 124.44,17.22 124.13,17.53 113.72,17.53 113.21,17.02 R14.2 111.83,14.39 USUP1.5
+12V  (via drill 0.6)
  Top 0.61: D1.C 45.05,16.1 45.47,16.51 | 45.47,16.51 48.84,16.51 C6.1 51.32,16.24 v51.56,16 v51.56,14.73 | 45.47,16.51 v43.69,16.51 | PDD_S.1 56.31,17.45 v56.13,17.27 | PDD_N.1 23.69,63.31 v23.62,63.5
  Bottom 0.61: v51.56,14.73 v51.56,16 51.56,17.02 51.82,17.27 53.85,17.27 | v43.69,16.51 43.94,16.51 44.45,16 44.45,11.37 R1.2 | 53.85,17.27 v56.13,17.27 67.82,17.27 68.33,17.78 68.33,31.5 62.99,36.83 62.99,52.07 61.98,53.09 61.98,56.39 | 61.98,56.39 61.98,62.74 61.21,63.5 v23.62,63.5 17.53,63.5 16.76,62.74 16.76,24.38 17.53,23.62 19.93,23.62 PDD_W.1 | PDD_E.1 61.9,56.31 61.98,56.39 | UREG.1 53.66,14.48 | 53.66,14.48 53.66,17.08 53.85,17.27 | UREG.3 55.56,14.04 55.37,14.22 53.91,14.22 53.66,14.48
+12V1  (via drill 0.6)
  Top 0.61: D5.C 129.05,16.1 129.47,16.51 | 129.47,16.51 132.84,16.51 C13.1 135.32,16.24 v135.56,16 v135.56,14.73 | 129.47,16.51 v127.69,16.51 | PDD_S1.1 140.31,17.45 v140.13,17.27 | PDD_N1.1 107.69,63.31 v107.62,63.5
  Bottom 0.61: v135.56,14.73 v135.56,16 135.56,17.02 135.82,17.27 137.85,17.27 | v127.69,16.51 127.94,16.51 128.45,16 128.45,11.37 R10.2 | 137.85,17.27 v140.13,17.27 151.82,17.27 152.33,17.78 152.33,31.5 146.99,36.83 146.99,52.07 145.98,53.09 145.98,56.39 | 145.98,56.39 145.98,62.74 145.21,63.5 v107.62,63.5 101.53,63.5 100.76,62.74 100.76,24.38 101.53,23.62 103.93,23.62 PDD_W1.1 | PDD_E1.1 145.9,56.31 145.98,56.39 | UREG1.1 137.66,14.48 | 137.66,14.48 137.66,17.08 137.85,17.27 | UREG1.3 139.56,14.04 139.37,14.22 137.91,14.22 137.66,14.48
-12V  (via drill 0.6)
  Top 0.61: D4.A 50.26,7.65 | 50.26,7.65 49.78,8.13 49.12,8.13 C7.1 | 50.26,7.65 51.34,7.65 v51.56,7.87 v51.56,9.14
  Bottom 0.61: v51.56,7.87 v51.56,9.14 49.28,9.14 48.69,9.73 48.69,18.29 | PDD_W.4 18.47,31.31 18.03,31.75 18.03,61.47 18.8,62.23 31.24,62.23 | 31.24,62.23 58.93,62.23 59.44,61.72 59.44,58.93 58.17,57.66 58.17,48.77 | 58.17,48.77 58.17,46.99 61.98,43.18 61.98,36.07 67.31,30.73 67.31,18.8 66.8,18.29 48.69,18.29 | PDD_S.4 48.69,18.29 | PDD_E.4 58.24,48.69 58.17,48.77 | PDD_N.4 31.31,62.16 31.24,62.23
-12V1  (via drill 0.6)
  Top 0.61: D8.A 134.26,7.65 | 134.26,7.65 133.78,8.13 133.12,8.13 C14.1 | 134.26,7.65 135.34,7.65 v135.56,7.87 v135.56,9.14
  Bottom 0.61: v135.56,7.87 v135.56,9.14 133.28,9.14 132.69,9.73 132.69,18.29 | PDD_W1.4 102.47,31.31 102.03,31.75 102.03,61.47 102.8,62.23 115.24,62.23 | 115.24,62.23 142.93,62.23 143.44,61.72 143.44,58.93 142.17,57.66 142.17,48.77 | 142.17,48.77 142.17,46.99 145.98,43.18 145.98,36.07 151.31,30.73 151.31,18.8 150.8,18.29 132.69,18.29 | PDD_S1.4 132.69,18.29 | PDD_E1.4 142.24,48.69 142.17,48.77 | PDD_N1.4 115.31,62.16 115.24,62.23
CAN_RX  (via drill 0.6)
  Top 0.254: UPIC.P$10 35.37,37.4 33.78,35.81 v32.51,35.81 | v26.67,35.81 12.95,35.81 12.57,35.43 12.45,35.31 6.99,29.84 UCAN.4
  Bottom 0.254: v32.51,35.81 v26.67,35.81
CAN_RX1  (via drill 0.6)
  Top 0.254: UPIC1.P$10 119.37,37.4 117.78,35.81 v116.51,35.81 | v110.67,35.81 96.95,35.81 96.57,35.43 96.45,35.31 90.98,29.84 UCAN1.4
  Bottom 0.254: v116.51,35.81 v110.67,35.81
CAN_TX  (via drill 0.6)
  Top 0.254: UPIC.P$11 36,35.24 35.56,34.8 v33.78,34.8 | v25.15,34.8 13.21,34.8 10.79,32.38 UCAN.1
  Bottom 0.254: v33.78,34.8 v25.15,34.8
CAN_TX1  (via drill 0.6)
  Top 0.254: UPIC1.P$11 120,35.24 119.56,34.8 v117.78,34.8 | v109.15,34.8 97.21,34.8 94.8,32.38 UCAN1.1
  Bottom 0.254: v117.78,34.8 v109.15,34.8
CANH
  Top 0.406: RCAN.1 15.75,5.42 15.75,6.1 15.24,6.6 9.91,6.6 9.53,6.99 UCAN.7 9.53,10.79 9.14,11.18 6.35,11.18 6.1,10.92 6.1,6.86 5.08,5.84 JCAN.2
CANH1
  Top 0.406: RCAN1.1 99.75,5.42 99.75,6.1 99.24,6.6 93.91,6.6 93.53,6.99 UCAN1.7 93.53,10.79 93.14,11.18 90.35,11.18 90.1,10.92 90.1,6.86 89.08,5.84 JCAN1.2
CANL
  Top 0.406: UCAN.6 8.26,7.24 7.62,6.6 JCAN.3
  Bottom 0.406: JPCAN.2 16.69,3.63 16.26,4.06 7.87,4.06 7.62,3.81 JCAN.3
CANL1
  Top 0.406: UCAN1.6 92.25,7.24 91.62,6.6 JCAN1.3
  Bottom 0.406: JPCAN1.2 100.69,3.63 100.26,4.06 91.87,4.06 91.62,3.81 JCAN1.3
DIL1  (via drill 0.6)
  Top 0.254: UPIC.P$20 41.95,35.01 42.42,34.54 59.44,34.54 60.2,33.78 v60.2,32 | v64.01,32 64.01,19.56 64.26,19.3 74.68,19.3 74.93,19.05 74.93,11.68 75.18,11.43 UDIL.1B
  Bottom 0.254: v60.2,32 v64.01,32 | RDIL1.1 UDIL.1B
DIL2  (via drill 0.6)
  Top 0.254: UPIC.P$15 38.7,31.66 v39.37,30.99 | v65.02,30.99 65.02,20.07 65.28,19.81 75.69,19.81 75.95,19.56 75.95,14.22 76.2,13.97 UDIL.2B
  Bottom 0.254: v39.37,30.99 v65.02,30.99 | RDIL2.1 UDIL.2B
DIL3  (via drill 0.6)
  Top 0.254: UPIC.P$14 38.05,30.28 v38.1,29.97 | v66.29,29.97 66.29,20.57 66.55,20.32 77.22,20.32 77.47,20.07 UDIL.3B
  Bottom 0.254: v38.1,29.97 v66.29,29.97 | RDIL3.1 UDIL.3B
DIL4  (via drill 0.6)
  Top 0.254: UPIC1.P$14 122.05,30.28 v122.1,29.97 | v150.29,29.97 150.29,20.57 150.55,20.32 161.22,20.32 161.47,20.07 UDIL1.3B
  Bottom 0.254: v122.1,29.97 v150.29,29.97 | RDIL4.1 UDIL1.3B
DIL5  (via drill 0.6)
  Top 0.254: UPIC1.P$15 122.7,31.66 v123.37,30.99 | v149.02,30.99 149.02,20.07 149.28,19.81 159.69,19.81 159.95,19.56 159.95,14.22 160.2,13.97 UDIL1.2B
  Bottom 0.254: v123.37,30.99 v149.02,30.99 | RDIL5.1 UDIL1.2B
DIL6  (via drill 0.6)
  Top 0.254: UPIC1.P$20 125.95,35.01 126.42,34.54 143.44,34.54 144.2,33.78 v144.2,32 | v148.01,32 148.01,19.56 148.26,19.3 158.68,19.3 158.93,19.05 158.93,11.68 159.18,11.43 UDIL1.1B
  Bottom 0.254: v144.2,32 v148.01,32 | RDIL6.1 UDIL1.1B
E_!A-B!  (via drill 0.6)
  Top 0.254: UPIC.P$37 41.3,44.86 42.93,46.48 42.93,51.56 43.69,52.32 55.88,52.32 56.13,52.07 v56.13,51.05 | PDD_E.5 60,28.9 v56.13,32.77
  Bottom 0.254: v56.13,32.77 v56.13,51.05
E_!A-B!1  (via drill 0.6)
  Top 0.254: UPIC1.P$37 125.3,44.86 126.93,46.48 126.93,51.56 127.69,52.32 139.88,52.32 140.13,52.07 v140.13,51.05 | PDD_E1.5 144,28.9 v140.13,32.77
  Bottom 0.254: v140.13,32.77 v140.13,51.05
E_!B-A!  (via drill 0.6)
  Top 0.254: UPIC.P$36 41.95,44.74 43.43,46.23 43.43,50.29 44.2,51.05 v54.36,51.05 | v54.36,32.77 54.36,32 57.4,28.96 57.4,22.86 57.91,22.35 59.89,22.35 PDD_E.7
  Bottom 0.254: v54.36,51.05 v54.36,32.77
E_!B-A!1  (via drill 0.6)
  Top 0.254: UPIC1.P$36 125.95,44.74 127.43,46.23 127.43,50.29 128.2,51.05 v138.36,51.05 | v138.36,32.77 138.36,32 141.4,28.96 141.4,22.86 141.91,22.35 143.89,22.35 PDD_E1.7
  Bottom 0.254: v138.36,51.05 v138.36,32.77
GND  (via drill 0.6)
  Top 0.254: URF.19 69.33,57.67 | 69.33,57.67 69.34,57.66 | URF.16 68.85,59.17 v69.34,58.67 | UPIC.P$16 39.35,37.57 39.37,37.59 | 39.37,37.59 v37.59,37.59 | 69.33,57.67 69.35,57.67 URF.PAD | UIMU.27 69.7,37.7 69.09,37.08 68.22,37.08 UIMU.2 | UIMU.14 70.87,31.68 70.87,32.64 71.13,32.9 UIMU.16 72.78,32.9 73.41,33.53 73.53,33.53 v74.04,34.04 | 39.37,37.59 40,37.59 UPIC.PAD | CBYP_2.2 39.88,32.68 39.88,31.75 40.13,31.75 40.13,31.5
  Bottom 0.61: UREG.2 54.61,11.43
  other vias: 77.72,58.17 65.02,60.2 65.02,55.88 70.36,57.66 74.68,61.21 73.91,54.86 63.25,54.86 63.25,57.4 63.25,59.94 63.25,62.48 70.61,28.45 74.17,28.45 50.29,40.39 51.82,49.02 52.58,44.7 57.66,42.16 39.62,49.53 37.08,47.24 34.04,43.94 28.19,37.08 46.48,43.69 41.4,48.77 37.59,42.42 42.42,42.42 42.42,37.59 60.71,78.74 55.63,78.74 50.55,78.74 45.47,78.74 40.39,78.74 35.31,78.74 30.23,78.74 25.15,78.74 9.91,78.74 4.83,78.74 1.27,67.56 1.27,62.48 1.27,57.4 1.27,52.32 1.27,47.24 1.27,42.16 1.27,37.08 1.27,32 1.27,26.92 1.27,21.84 1.27,16.76 1.27,11.68 1.27,6.6 78.49,54.1 78.49,49.02 78.49,43.94 78.49,38.86 78.49,33.78 78.49,28.7 78.49,23.62 25.15,66.74 37.15,66.74 49.15,66.74 78.49,64.26 78.49,69.34 78.49,74.42 61.15,66.74 30.48,16.26 34.8,16.26 59.94,15.49 60.2,6.86 66.04,15.49 60.2,2.29 64.52,2.29 8.64,17.78 8.64,22.61 12.95,20.57 36.07,30.48 38.35,27.43 31.24,27.43 50.04,26.92 46.99,32.77
  pour Bottom (isolate 0.254, rank 6): 0,0 80.01,0 80.01,80.01 0,80.01
  pour Top (isolate 0.254, rank 6): 0,0 80.01,0 80.01,80.01 0,80.01
GND1  (via drill 0.6)
  Top 0.254: URF1.19 153.33,57.67 | 153.33,57.67 153.34,57.66 | URF1.16 152.85,59.17 v153.34,58.67 | UPIC1.P$16 123.35,37.57 123.37,37.59 | 123.37,37.59 v121.59,37.59 | 153.33,57.67 153.35,57.67 URF1.PAD | UIMU1.27 153.7,37.7 153.09,37.08 152.22,37.08 UIMU1.2 | UIMU1.14 154.87,31.68 154.87,32.64 155.13,32.9 UIMU1.16 156.78,32.9 157.41,33.53 157.53,33.53 v158.04,34.04 | 123.37,37.59 124,37.59 UPIC1.PAD | CBYP_5.2 123.88,32.68 123.88,31.75 124.13,31.75 124.13,31.5
  Bottom 0.61: UREG1.2 138.61,11.43
  other vias: 161.72,58.17 149.02,60.2 149.02,55.88 154.36,57.66 158.68,61.21 157.91,54.86 147.25,54.86 147.25,57.4 147.25,59.94 147.25,62.48 154.61,28.45 158.17,28.45 134.29,40.39 135.82,49.02 136.58,44.7 141.66,42.16 123.62,49.53 121.08,47.24 118.04,43.94 112.19,37.08 130.48,43.69 125.4,48.77 121.59,42.42 126.42,42.42 126.42,37.59 144.71,78.74 139.63,78.74 134.55,78.74 129.47,78.74 124.39,78.74 119.31,78.74 114.23,78.74 109.15,78.74 93.91,78.74 88.83,78.74 85.27,67.56 85.27,62.48 85.27,57.4 85.27,52.32 85.27,47.24 85.27,42.16 85.27,37.08 85.27,32 85.27,26.92 85.27,21.84 85.27,16.76 85.27,11.68 85.27,6.6 162.49,54.1 162.49,49.02 162.49,43.94 162.49,38.86 162.49,33.78 162.49,28.7 162.49,23.62 109.15,66.74 121.15,66.74 133.15,66.74 162.49,64.26 162.49,69.34 162.49,74.42 145.15,66.74 114.48,16.26 118.8,16.26 143.94,15.49 144.2,6.86 150.04,15.49 144.2,2.29 148.52,2.29 92.64,17.78 92.64,22.61 96.95,20.57 120.07,30.48 122.35,27.43 115.24,27.43 134.04,26.92 130.99,32.77
  pour Bottom (isolate 0.254, rank 6): 84,0 164.01,0 164.01,80.01 84,80.01
  pour Top (isolate 0.254, rank 6): 84,0 164.01,0 164.01,80.01 84,80.01
LED_1  (via drill 0.6)
  Top 0.254: UPIC.P$13 37.4,33.08 37.08,32.77 v33.78,32.77 | v21.59,32.77 18.29,32.77 17.78,32.26 17.78,8.89 18.8,7.87 21.59,7.87 22.1,7.37 LED_1.C
  Bottom 0.254: v33.78,32.77 v21.59,32.77
LED_2  (via drill 0.6)
  Top 0.254: UPIC.P$12 36.75,34.21 36.32,33.78 v32.51,33.78 | LED_2.C 18.05,6.34 16.76,7.62 16.76,33.27 17.27,33.78 v23.11,33.78
  Bottom 0.254: v32.51,33.78 v23.11,33.78
LED_3  (via drill 0.6)
  Top 0.254: UPIC1.P$13 121.4,33.08 121.08,32.77 v117.78,32.77 | v105.59,32.77 102.29,32.77 101.78,32.26 101.78,8.89 102.8,7.87 105.59,7.87 106.1,7.37 LED_3.C
  Bottom 0.254: v117.78,32.77 v105.59,32.77
LED_4  (via drill 0.6)
  Top 0.254: UPIC1.P$12 120.75,34.21 120.32,33.78 v116.51,33.78 | LED_4.C 102.05,6.34 100.76,7.62 100.76,33.27 101.27,33.78 v107.11,33.78
  Bottom 0.254: v116.51,33.78 v107.11,33.78
LED_RX  (via drill 0.6)
  Top 0.254: LED_RX.C 15.23,78.22 v14.99,77.98
  Bottom 0.254: v14.99,77.98 14.99,70.1 14.73,69.85 9.4,69.85 9.21,69.67 UUSB.22
LED_RX1  (via drill 0.6)
  Top 0.254: LED_RX1.C 99.23,78.22 v98.99,77.98
  Bottom 0.254: v98.99,77.98 98.99,70.1 98.73,69.85 93.4,69.85 93.22,69.67 UUSB1.22
LED_TX  (via drill 0.6)
  Top 0.254: v20.32,77.72 20.32,77.98 20.07,78.23 19.06,78.23 LED_TX.C
  Bottom 0.254: UUSB.23 9.87,68.79 10.16,69.09 20.07,69.09 20.32,69.34 v20.32,77.72
LED_TX1  (via drill 0.6)
  Top 0.254: v104.32,77.72 104.32,77.98 104.07,78.23 103.06,78.23 LED_TX1.C
  Bottom 0.254: UUSB1.23 93.86,68.79 94.16,69.09 104.07,69.09 104.32,69.34 v104.32,77.72
MISO  (via drill 0.6)
  Top 0.254: URF.2 69.35,55.13 69.09,54.86 69.09,47.75 64.26,42.93 64.26,40.13 | UPIC.P$27 63.77,39.35 64.26,39.88 64.26,40.13 | UIMU.7 69.66,34.1 v69.85,34.29 | v70.1,36.83 69.77,36.5 UIMU.3 67.13,36.5 66.04,37.59 66.04,39.88 65.81,40.11 64.28,40.11 64.26,40.13
  Bottom 0.254: v69.85,34.29 69.85,36.58 v70.1,36.83
MISO1  (via drill 0.6)
  Top 0.254: URF1.2 153.35,55.13 153.09,54.86 153.09,47.75 148.26,42.93 148.26,40.13 | UPIC1.P$27 147.77,39.35 148.26,39.88 148.26,40.13 | UIMU1.7 153.66,34.1 v153.85,34.29 | v154.1,36.83 153.77,36.5 UIMU1.3 151.13,36.5 150.04,37.59 150.04,39.88 149.81,40.11 148.28,40.11 148.26,40.13
  Bottom 0.254: v153.85,34.29 153.85,36.58 v154.1,36.83
MOSI  (via drill 0.6)
  Top 0.254: URF.20 67.9,48.6 66.55,47.24 v65.79,47.24 | UIMU.9 67.18,32.9 66.17,33.91 | 66.17,33.91 65.02,35.05 65.02,36.83 63.8,38.05 UPIC.P$25 | UIMU.1 68.18,37.7 v67.06,38.86 | v66.8,34.8 66.8,34.54 66.17,33.91
  Bottom 0.254: v66.8,34.8 66.8,38.61 v67.06,38.86 65.79,40.13 v65.79,47.24
MOSI1  (via drill 0.6)
  Top 0.254: URF1.20 151.9,48.6 150.55,47.24 v149.79,47.24 | UIMU1.9 151.18,32.9 150.17,33.91 | 150.17,33.91 149.02,35.05 149.02,36.83 147.8,38.05 UPIC1.P$25 | UIMU1.1 152.18,37.7 v151.06,38.86 | v150.8,34.8 150.8,34.54 150.17,33.91
  Bottom 0.254: v150.8,34.8 150.8,38.61 v151.06,38.86 149.79,40.13 v149.79,47.24
N$1
  Top 0.254: CRF1.2 69.34,64.15 LRF1.2 69.34,64.37 CRF4.2
N$2
  Top 0.254: LED_TX.A RLTX.2
N$3
  Top 0.254: CRF2.2 70.87,64.15 CRF3.2 70.87,64.37 LRF2.1
N$4
  Top 0.254: CRF5.2 70.1,68.33 70.1,68.07
  pour Top (no thermals): 68.83,66.55 68.83,67.82 69.34,68.33 70.87,68.33 71.37,67.82 71.37,66.55 70.61,66.55 70.61,67.06 69.6,67.06 69.6,66.55
N$5
  Top 0.406: UCAN.8 12.67,9.34 RS_CAN.2
N$6
  Top 0.406: RCAN.2 14.14,2.88 JPCAN.1
N$7
  Top 0.254: LRF3.2 arc-90 70.22,69.6 CRF6.2
  Top 1.422: LRF3.2 arc90 LRF3.2 JANT.A
N$8
  Top 0.254: LED_RX.A RLRX.2
N$9
  Top 0.254: LED_1.A RL1.2
N$10
  Top 0.254: LED_2.A RL2.2
N$11
  Top 0.61: UDCDC.5 39.49,14.38 C2.1
N$12
  Bottom 0.61: JBAT.2 36.21,9.76 40.13,5.84 40.13,4.13 SWON.2
N$13
  Top 0.61: L1.2 34.61,9.75 UDCDC.1 38.54,10.85 38.86,11.18 42.93,11.18 C4.1 C3.1
N$14
  Top 0.61: C3.2 46.39,8.22 46.99,7.62 46.99,5.78 R4.2 47.07,4.25 D3.A
N$15
  Top 0.61: D2.C 44.33,13.84 R3.1
N$16
  Top 0.61: C4.2 46.39,13.47 R3.2 D1.A
N$17
  Top 0.254: R5.2 26.02,15.38 26.42,14.99 26.42,14.3 USUP.6
N$18  (via drill 0.6)
  Top 0.61: v41.66,7.87 41.66,9.4 41.4,9.65 40.54,9.65 UDCDC.3
  Bottom 0.61: R1.1 42.55,9.65 R2.2 42.48,8.7 v41.66,7.87
N$19
  Top 0.61: R4.1 D4.C
N$20
  Top 0.254: CCONT2.2 75.22,39.88 RCONT.2
N$21
  Top 0.61: 69.85,49.02 75.69,49.02 78.23,51.56 78.99,51.56
N$22
  Top 0.254: LED_POW.A RLPOW.2
N$23
  Top 0.406: UCAN1.8 96.67,9.34 RS_CAN1.2
N$24
  Top 0.254: CRF7.2 153.34,64.15 LRF4.2 153.34,64.37 CRF10.2
N$25
  Top 0.254: CRF8.2 154.87,64.15 CRF9.2 154.87,64.37 LRF5.1
N$26
  Top 0.254: CRF11.2 154.1,68.33 154.1,68.07
  pour Top (no thermals): 152.83,66.55 152.83,67.82 153.34,68.33 154.87,68.33 155.37,67.82 155.37,66.55 154.61,66.55 154.61,67.06 153.6,67.06 153.6,66.55
N$27
  Top 0.254: LRF6.2 arc-90 154.22,69.6 CRF12.2
  Top 1.422: LRF6.2 arc90 LRF6.2 JANT1.A
N$28
  Top 0.406: RCAN1.2 98.14,2.88 JPCAN1.1
N$29
  Top 0.254: LED_TX1.A RLTX1.2
N$30
  Top 0.254: LED_RX1.A RLRX1.2
N$31
  Top 0.254: LED_3.A RL3.2
N$32
  Top 0.254: LED_4.A RL4.2
N$33
  Top 0.61: L2.2 118.61,9.75 UDCDC1.1 122.54,10.85 122.86,11.18 126.93,11.18 C12.1 C11.1
N$34
  Top 0.61: UDCDC1.5 123.49,14.38 C10.1
N$35
  Top 0.61: D6.C 128.33,13.84 R9.1
N$36
  Top 0.61: C12.2 130.39,13.47 R9.2 D5.A
N$37
  Top 0.61: R12.1 D8.C
N$38
  Top 0.61: C11.2 130.39,8.22 130.99,7.62 130.99,5.78 R12.2 131.07,4.25 D7.A
N$39  (via drill 0.6)
  Top 0.61: v125.66,7.87 125.66,9.4 125.4,9.65 124.54,9.65 UDCDC1.3
  Bottom 0.61: R10.1 126.55,9.65 R11.2 126.48,8.7 v125.66,7.87
N$40
  Top 0.254: R13.2 110.02,15.38 110.42,14.99 110.42,14.3 USUP1.6
N$41
  Bottom 0.61: JBAT1.2 120.21,9.76 124.13,5.84 124.13,4.13 SWON1.2
N$42
  Top 0.254: CCONT4.2 159.22,39.88 RCONT1.2
N$43
  Top 0.254: LED_POW1.A RLPOW1.2
N$44
  Top 0.61: 153.85,49.02 159.69,49.02 162.23,51.56 162.99,51.56
N_!A-B!
  Top 0.254: UPIC.P$41 38.7,52.67 44.2,58.17 51.82,58.17 52.32,58.67 52.32,59.86 PDD_N.5
N_!A-B!1
  Top 0.254: UPIC1.P$41 122.7,52.67 128.2,58.17 135.82,58.17 136.32,58.67 136.32,59.86 PDD_N1.5
N_!B-A!
  Top 0.254: PDD_N.7 57.66,59.88 57.66,57.91 57.15,57.4 46.23,57.4 42.42,53.34 42.42,46.74 40.65,44.97 UPIC.P$38
N_!B-A!1
  Top 0.254: PDD_N1.7 141.66,59.88 141.66,57.91 141.15,57.4 130.23,57.4 126.42,53.34 126.42,46.74 124.65,44.97 UPIC1.P$38
PGC
  Top 0.254: UPIC.P$22 62.3,36 62.74,35.56 62.74,9.14 63.25,8.64 77.22,8.64 77.47,8.38 JICSP.5
PGC1
  Top 0.254: UPIC1.P$22 146.3,36 146.74,35.56 146.74,9.14 147.25,8.64 161.22,8.64 161.47,8.38 JICSP1.5
PGD
  Top 0.254: JICSP.4 74.93,7.62 74.68,7.87 62.74,7.87 61.98,8.64 61.98,34.54 61.47,35.05 42.93,35.05 42.6,35.38 UPIC.P$21
PGD1
  Top 0.254: JICSP1.4 158.93,7.62 158.68,7.87 146.74,7.87 145.98,8.64 145.98,34.54 145.47,35.05 126.93,35.05 126.6,35.38 UPIC1.P$21
R_RFBIAS
  Top 0.254: URF.17 R_RFBIAS.1
R_RFBIAS1
  Top 0.254: URF1.17 R_RFBIAS1.1
RF_N
  Top 0.254: URF.13 69.85,61.33 CRF1.1
RF_N1
  Top 0.254: URF1.13 153.85,61.33 CRF7.1
RF_P
  Top 0.254: URF.12 70.35,61.32 CRF2.1
RF_P1
  Top 0.254: URF1.12 154.35,61.32 CRF8.1
S_!A-B!
  Top 0.254: UPIC.P$9 35.26,38.05 34.04,36.83 31.5,36.83 27.69,33.02 27.69,20.15 PDD_S.5
S_!A-B!1
  Top 0.254: UPIC1.P$9 119.26,38.05 118.04,36.83 115.5,36.83 111.69,33.02 111.69,20.15 PDD_S1.5
S_!B-A!
  Top 0.254: UPIC.P$8 34.89,38.7 33.78,37.59 30.73,37.59 22.35,29.21 22.35,20.11 PDD_S.7
S_!B-A!1
  Top 0.254: UPIC1.P$8 118.89,38.7 117.78,37.59 114.73,37.59 106.35,29.21 106.35,20.11 PDD_S1.7
SCLK  (via drill 0.6)
  Top 0.254: URF.1 68.85,55.64 68.58,55.37 68.58,48.26 65.02,44.7 v64.52,44.7 | UIMU.13 70.3,32.71 70.87,33.27 70.87,35.31 70.27,35.9 UIMU.4 66.72,35.9 65.02,37.59 | UPIC.P$26 63.92,38.7 65.02,37.59 | 65.02,37.59 v65.02,39.12
  Bottom 0.254: v65.02,39.12 65.02,44.2 v64.52,44.7
SCLK1  (via drill 0.6)
  Top 0.254: URF1.1 152.85,55.64 152.58,55.37 152.58,48.26 149.02,44.7 v148.52,44.7 | UIMU1.13 154.3,32.71 154.87,33.27 154.87,35.31 154.27,35.9 UIMU1.4 150.72,35.9 149.02,37.59 | UPIC1.P$26 147.92,38.7 149.02,37.59 | 149.02,37.59 v149.02,39.12
  Bottom 0.254: v149.02,39.12 149.02,44.2 v148.52,44.7
SENSE_BAT
  Top 0.254: UPIC.P$19 41.3,34.9 44.7,31.5 44.7,27.27 R8.2 R7.2
SENSE_BAT1
  Top 0.254: UPIC1.P$19 125.3,34.9 128.7,31.5 128.7,27.27 R16.2 R15.2
SHIELD
  Top 0.61: 67.06,53.59 62.48,53.59 61.98,54.1 61.98,64.52 61.47,65.02 51.82,65.02
SHIELD1
  Top 0.61: 151.06,53.59 146.48,53.59 145.98,54.1 145.98,64.52 145.47,65.02 135.82,65.02
USB_RX  (via drill 0.6)
  Top 0.254: UPIC.P$5 10.4,40.65 9.91,41.15 v9.91,55.37
  Bottom 0.254: UUSB.5 10.52,58.77 9.91,58.17 v9.91,55.37
USB_RX1  (via drill 0.6)
  Top 0.254: UPIC1.P$5 94.4,40.65 93.91,41.15 v93.91,55.37
  Bottom 0.254: UUSB1.5 94.52,58.77 93.91,58.17 v93.91,55.37
USB_TX  (via drill 0.6)
  Top 0.254: UPIC.P$4 15.09,41.3 14.48,41.91 v14.48,59.69
  Bottom 0.254: UUSB.1 14.32,59.84 v14.48,59.69
USB_TX1  (via drill 0.6)
  Top 0.254: UPIC1.P$4 99.09,41.3 98.48,41.91 v98.48,59.69
  Bottom 0.254: UUSB1.1 98.32,59.84 v98.48,59.69
USBDM  (via drill 0.6)
  Top 0.254: JUSB.D- 8.42,66.59 8.13,66.29 6.35,66.29 6.1,66.04 v6.1,64.26
  Bottom 0.254: v6.1,64.26 5.59,64.26 5.32,64.53 UUSB.16
USBDM1  (via drill 0.6)
  Top 0.254: JUSB1.D- 92.42,66.59 92.13,66.29 90.35,66.29 90.1,66.04 v90.1,64.26
  Bottom 0.254: v90.1,64.26 89.59,64.26 89.31,64.53 UUSB1.16
USBDP  (via drill 0.6)
  Top 0.254: v5.08,62.99 5.08,66.8 5.33,67.06 7.37,67.06 7.62,67.31 JUSB.D+
  Bottom 0.254: UUSB.15 4.67,63.41 v5.08,62.99
USBDP1  (via drill 0.6)
  Top 0.254: v89.08,62.99 89.08,66.8 89.33,67.06 91.37,67.06 91.62,67.31 JUSB1.D+
  Bottom 0.254: UUSB1.15 88.67,63.41 v89.08,62.99
VBAT  (via drill 0.6)
  Top 0.254: USUP.8 USUP.7 25.18,12.7 | 25.18,12.7 USUP.2 | 25.18,12.7 25.18,12.69 R6.1 30.47,12.69 30.48,12.7 | 37.59,13.21 v37.59,15.75 | v37.59,20.07 37.59,22.35 38.1,22.86 42.67,22.86 43.18,23.37 43.18,24.8 R7.1
  Top 0.61: SWON.1 37.46,5.72 36.58,6.6 30.59,6.6 C1.+ 30.48,12.7 30.99,13.21 34.27,13.21 L1.1 34.36,13.21 37.59,13.21 38.1,13.21 38.54,12.77 UDCDC.6
  Bottom 0.254: v37.59,15.75 v37.59,20.07
VBAT1  (via drill 0.6)
  Top 0.254: USUP1.8 USUP1.7 109.17,12.7 | 109.17,12.7 USUP1.2 | 109.17,12.7 109.19,12.69 R14.1 114.47,12.69 114.48,12.7 | 121.59,13.21 v121.59,15.75 | v121.59,20.07 121.59,22.35 122.1,22.86 126.67,22.86 127.18,23.37 127.18,24.8 R15.1
  Top 0.61: SWON1.1 121.46,5.72 120.58,6.6 114.59,6.6 C9.+ 114.48,12.7 114.99,13.21 118.27,13.21 L2.1 118.36,13.21 121.59,13.21 122.1,13.21 122.54,12.77 UDCDC1.6
  Bottom 0.254: v121.59,15.75 v121.59,20.07
VCAP
  Top 0.254: UPIC.P$7 32.62,39.35 CCAP.1
VCAP1
  Top 0.254: UPIC1.P$7 116.62,39.35 CCAP1.1
VCONT
  Top 0.254: UIMU.26 70.3,39.34 CCONT2.1 70.78,42.07 CCONT1.1
VCONT1
  Top 0.254: UIMU1.26 154.3,39.34 CCONT4.1 154.78,42.07 CCONT3.1
VCT
  Top 0.254: USUP.3 26.45,7.29 C8.1
VCT1
  Top 0.254: USUP1.3 110.44,7.29 C15.1
VDCOUPL
  Top 0.254: URF.5 72.45,56.22 CBYP_RFD3.2
VDCOUPL1
  Top 0.254: URF1.5 156.45,56.22 CBYP_RFD4.2
VREF
  Top 0.254: 23.88,9.16 USUP.1 23.88,9.22 23.88,9.91 23.7,10.08 CREF.2
VREF1
  Top 0.254: 107.88,9.16 USUP1.1 107.88,9.22 107.88,9.91 107.7,10.08 CREF1.2
W_!A-B!
  Top 0.254: UPIC.P$3 30.51,41.95 PDD_W.5
W_!A-B!1
  Top 0.254: UPIC1.P$3 114.51,41.95 PDD_W1.5
W_!B-A!
  Top 0.254: UPIC.P$2 31.31,42.6 21.84,52.07 21.84,56.9 21.34,57.4 20.14,57.4 PDD_W.7
W_!B-A!1
  Top 0.254: UPIC1.P$2 115.31,42.6 105.84,52.07 105.84,56.9 105.34,57.4 104.14,57.4 PDD_W1.7
X1_OSC1
  Top 0.254: UPIC.P$30 45.11,41.3 45.47,41.66 45.47,44.96 45.72,45.21 48.44,45.21 X1.P$1 48.55,45.25 49.53,46.23 CX1_1.1
X1_OSC2
  Top 0.254: UPIC.P$31 44.74,41.95 44.96,42.16 44.96,46.91 X1.P$2 45.68,48.22 46.74,49.02 CX1_2.1
X1_OSC3
  Top 0.254: UPIC1.P$30 129.11,41.3 129.47,41.66 129.47,44.96 129.72,45.21 132.44,45.21 X3.P$1 132.55,45.25 133.53,46.23 CX1_3.1
X1_OSC4
  Top 0.254: UPIC1.P$31 128.74,41.95 128.96,42.16 128.96,46.91 X3.P$2 129.68,48.22 130.74,49.02 CX1_4.1
X2_OSC1
  Top 0.254: URF.8 73.15,58.17 75.18,56.13 75.78,56.13 CX2_1.1 77.63,55.97 X2.P$1
X2_OSC2
  Top 0.254: URF.10 71.8,59.61 72.14,59.94 75.78,59.94 CX2_2.1 77.57,60.11 X2.P$2
X2_OSC3
  Top 0.254: URF1.8 157.15,58.17 159.18,56.13 159.78,56.13 CX2_3.1 161.63,55.97 X4.P$1
X2_OSC4
  Top 0.254: URF1.10 155.8,59.61 156.14,59.94 159.78,59.94 CX2_4.1 161.57,60.11 X4.P$2